# Altium PCB PCB_MCS_MEA_largeREF.PcbDoc
Units mm, origin at the board's own origin, x right, y up, seen from the top; angles counter-clockwise.
Board outline 49 x 49 mm, 4 copper layers (Top Copper Layer, Internal Copper Layer 1, Internal Copper Layer 2, Bottom Copper Layer), stack 1.58 mm thick; 1 components, 60 nets, 120 pads, 0 vias.
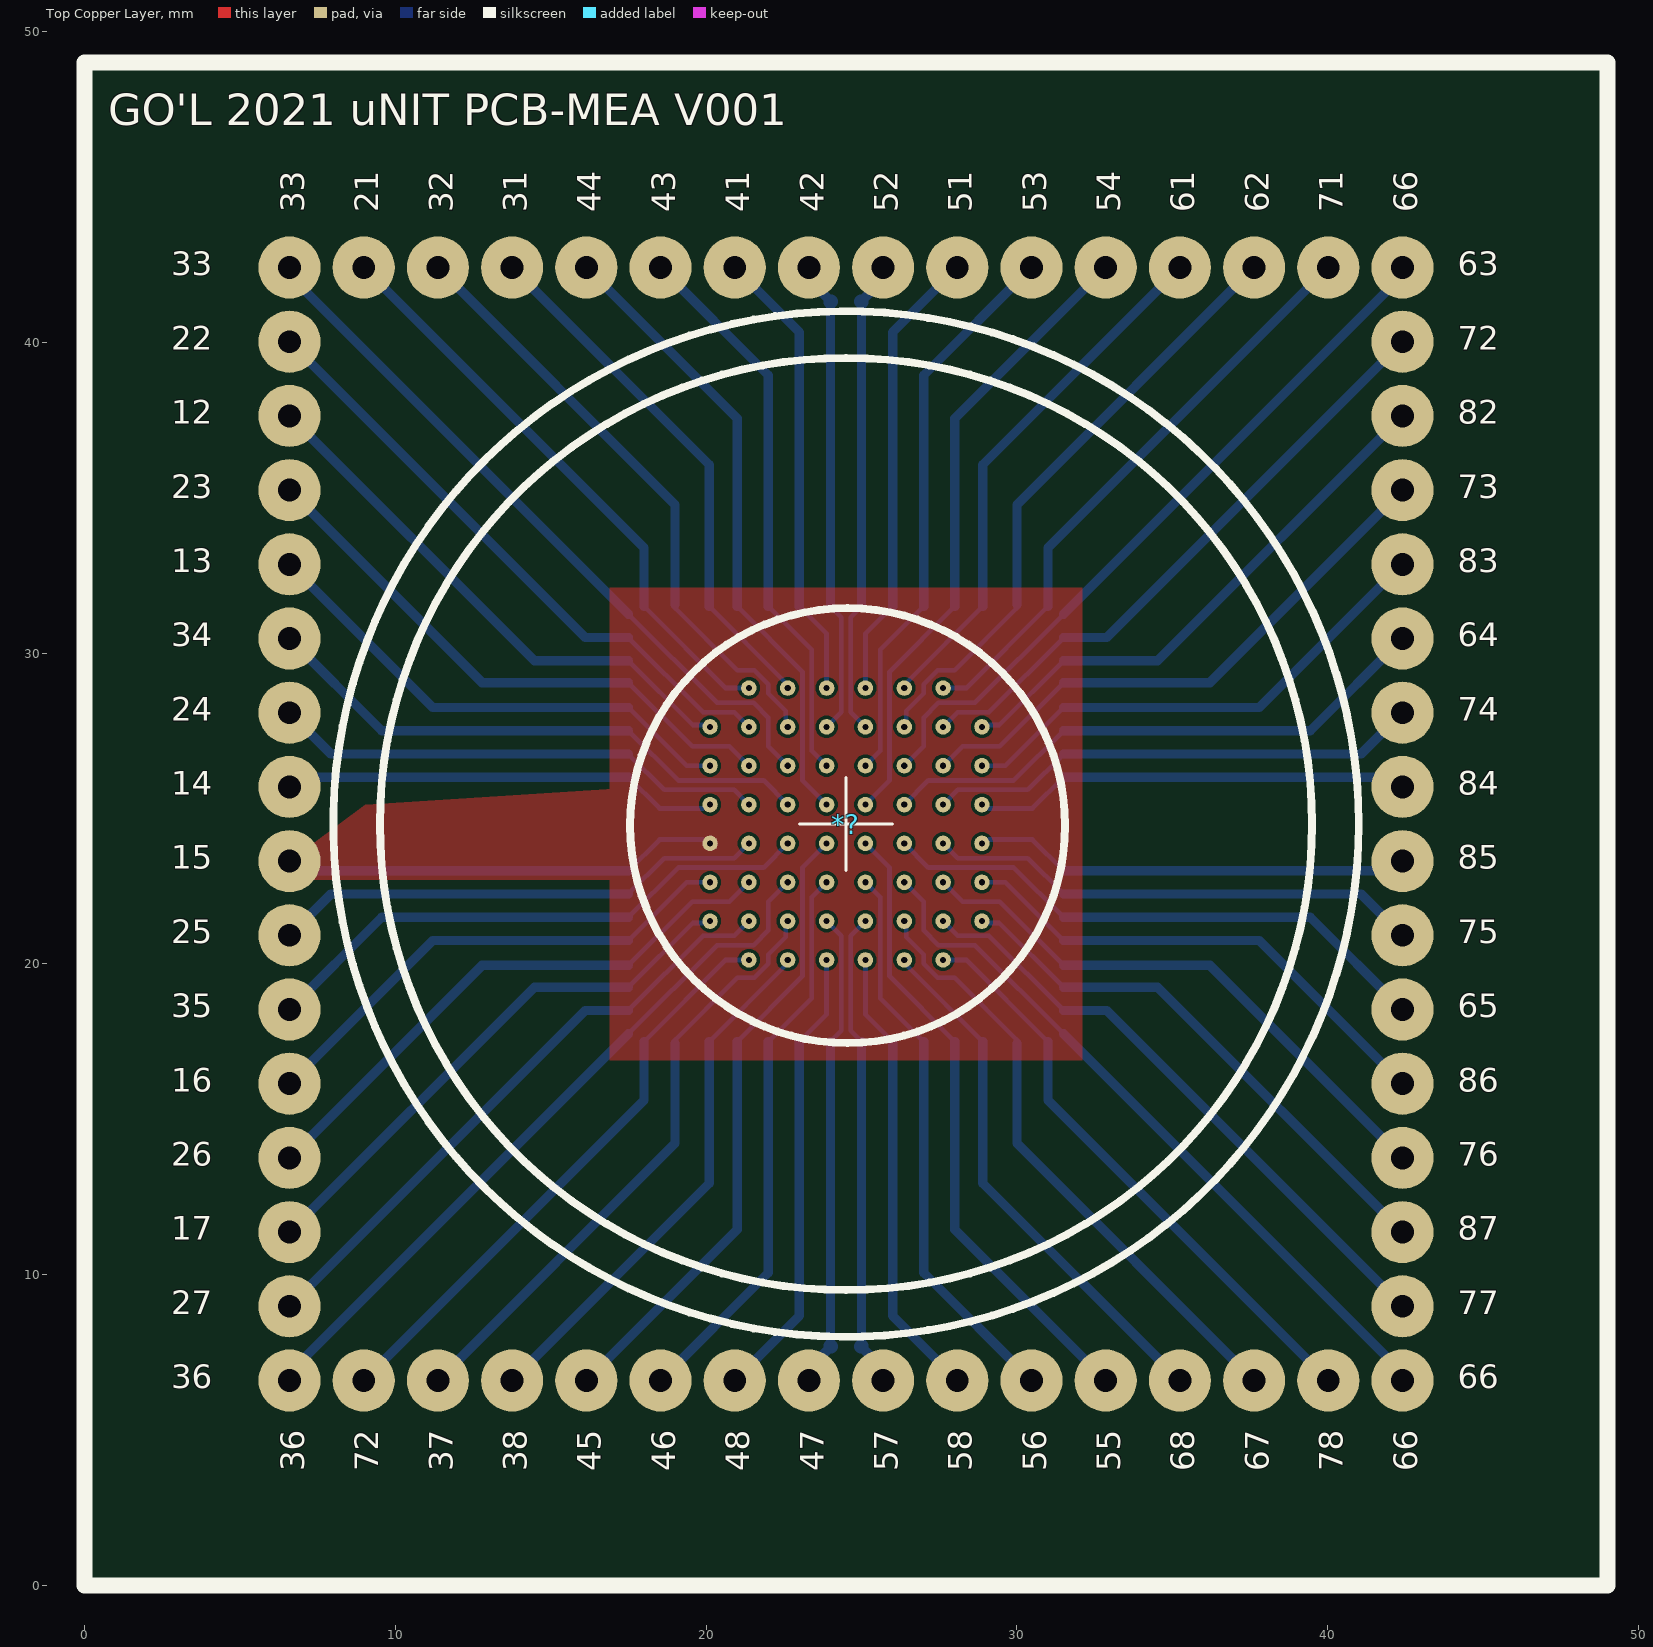
[diagram p0: Top Copper Layer view]
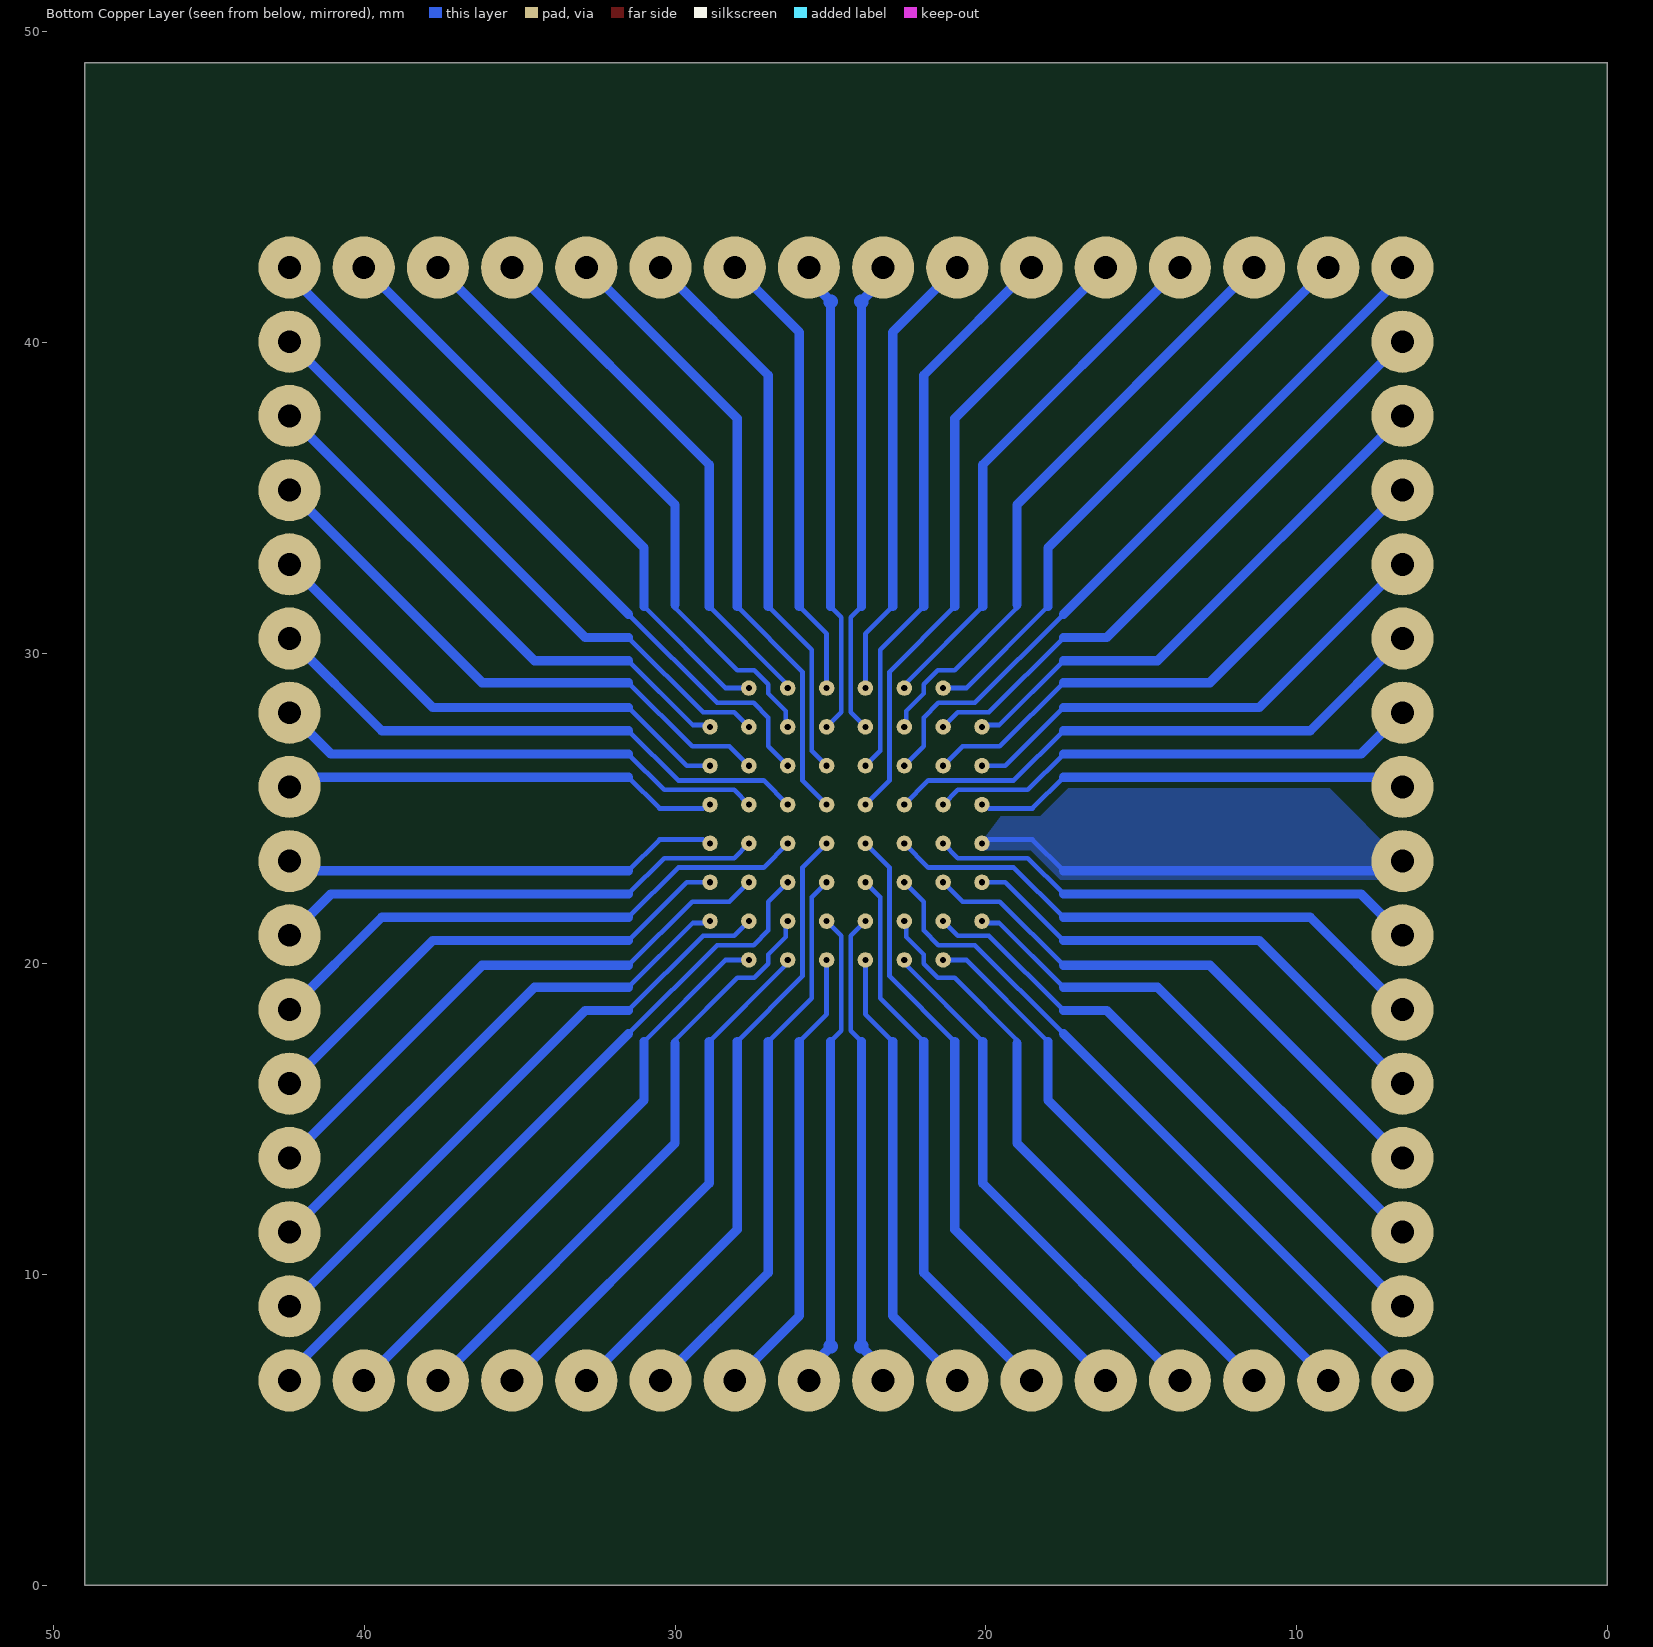
[diagram p1: Bottom Copper Layer view, seen from below]

## Layer stack, top to bottom
Top Solder: solder mask 0.01, Solder Resist, Dk 3.5
Top Copper Layer: signal copper 0.035
Dielectric 1: prepreg 0.22, FR-4, Dk 4.2
Internal Copper Layer 1: signal copper 0.035
Dielectric 2: core 1, FR-4, Dk 4.2
Internal Copper Layer 2: signal copper 0.035
Dielectric 3: prepreg 0.22, FR-4, Dk 4.2
Bottom Copper Layer: signal copper 0.035
Bottom Solder: solder mask 0.01, Solder Resist, Dk 3.5

## Board outline
0,0 49,0 49,49 0,49

## Design rules (kind name [scope] priority, off if disabled: settings)
BoardOutlineClearance [All] p1: gap=0.4 ignorepadtopadclearanceinfootprint=FALSE
Clearance [All] p1: gap=0.102 ignorepadtopadclearanceinfootprint=TRUE
ComponentClearance [All] p1: gap=0.15 collisioncheckmode=3 verticalgap=0.15 showdistances=FALSE
HoleSize [All] p1: absolutevalues=TRUE maxlimit=0.4 minlimit=0.25 maxpercent=80.000 minpercent=20.000
HoleToHoleClearance [All] p1: gap=0.45 allowstackedmicrovias=TRUE
MinimumAnnularRing [All] p1: minimumring=0.15
MinimumSolderMaskSliver [All] p1: minsoldermaskwidth=0.15
PlaneClearance [All] p1: clearance=0.15
PlaneConnect [All] p1: planeconnectstyle=Relief reliefexpansion=0.25 reliefentries=4 reliefconductorwidth=0.15 reliefairgap=0.15
PolygonConnect [All] p1: connectstyle=Direct reliefconductorwidth=0.15 reliefentries=4 polygonreliefangle="90 Angle" airgapwidth=0.15
RoomDefinition PCB_MCS_MEA_REF [InComponentClass('PCB_MCS_MEA_REF')] p1 off: confinementstyle=ConfineIn formatcopy=TRUE lockcomponents=FALSE outline 0,0 50.8,0 50.8,25.4 0,25.4
RoutingVias [All] p1: holewidth=0.25 width=0.55 viastyle="Through Hole" minholewidth=0.25 minwidth=0.55 maxholewidth=0.4 maxwidth=0.8
SilkToSilkClearance [All] p1: silktosilkclearance=0.2
SilkToSolderMaskClearance [IsPad] p1: minsilkscreentomaskgap=0.2 clearancetoexposedcopper=TRUE
SolderMaskExpansion [All] p1: expansion=0.15 istentingtop=FALSE
Width [All] p1: maxlimit=50 minlimit=0.15 preferedwidth=0.203
22 further rules are at their usual default settings.

## Components (designator, comment, footprint, x,y, rotation, side; value= is the part's Value field where it differs from the comment)
*? "POGO_PINS" MCS_MEA_VE_TEST_1P25 24.5,24.5 r0 top locked

## Footprints (in the part's own frame and the unit in brackets; to place one, negate y for a bottom-side part, rotate by r counter-clockwise, add the part's x,y. Pads: shape width x height; smd on the part's side, far side on the other; paste and mask are expansions set on the pad)
MCS_MEA_VE_TEST_1P25 [mm]
  round 2 hole 0.737 mask+0.15: 12(-17.907,13.132) 13(-17.907,8.357) 14(-17.907,1.194) 15(-17.907,-1.194) 16(-17.907,-8.357) 17(-17.907,-13.132) 21(-15.519,17.907) 22(-17.907,15.519) 23(-17.907,10.744) 24(-17.907,3.581) 25(-17.907,-3.581) 26(-17.907,-10.744) 27(-17.907,-15.519) 28(-15.519,-17.907) 31(-10.744,17.907) 32(-13.132,17.907) 33(-17.907,17.907) 34(-17.907,5.969) 35(-17.907,-5.969) 36(-17.907,-17.907) 37(-13.132,-17.907) 38(-10.744,-17.907) 41(-3.581,17.907) 42(-1.194,17.907) 43(-5.969,17.907) 44(-8.357,17.907) 45(-8.357,-17.907) 46(-5.969,-17.907) 47(-1.194,-17.907) 48(-3.581,-17.907) 51(3.581,17.907) 52(1.194,17.907) 53(5.969,17.907) 54(8.357,17.907) 55(8.357,-17.907) 56(5.969,-17.907) 57(1.194,-17.907) 58(3.581,-17.907) 61(10.744,17.907) 62(13.132,17.907) 63(17.907,17.907) 64(17.907,5.969) 65(17.907,-5.969) 66(17.907,-17.907) 67(13.132,-17.907) 68(10.744,-17.907) 71(15.519,17.907) 72(17.907,15.519) 73(17.907,10.744) 74(17.907,3.581) 75(17.907,-3.581) 76(17.907,-10.744) 77(17.907,-15.519) 78(15.519,-17.907) 82(17.907,13.132) 83(17.907,8.357) 84(17.907,1.194) 85(17.907,-1.194) 86(17.907,-8.357) 87(17.907,-13.132)
  round 0.5 hole 0.2 mask+0: 12(-4.375,3.125) 13(-4.375,1.875) 14(-4.375,0.625) 15(-4.375,-0.625) 16(-4.375,-1.875) 17(-4.375,-3.125) 21(-3.125,4.375) 22(-3.125,3.125) 23(-3.125,1.875) 24(-3.125,0.625) 25(-3.125,-0.625) 26(-3.125,-1.875) 27(-3.125,-3.125) 28(-3.125,-4.375) 31(-1.875,4.375) 32(-1.875,3.125) 33(-1.875,1.875) 34(-1.875,0.625) 35(-1.875,-0.625) 36(-1.875,-1.875) 37(-1.875,-3.125) 38(-1.875,-4.375) 41(-0.625,4.375) 42(-0.625,3.125) 43(-0.625,1.875) 44(-0.625,0.625) 45(-0.625,-0.625) 46(-0.625,-1.875) 47(-0.625,-3.125) 48(-0.625,-4.375) 51(0.625,4.375) 52(0.625,3.125) 53(0.625,1.875) 54(0.625,0.625) 55(0.625,-0.625) 56(0.625,-1.875) 57(0.625,-3.125) 58(0.625,-4.375) 61(1.875,4.375) 62(1.875,3.125) 63(1.875,1.875) 64(1.875,0.625) 65(1.875,-0.625) 66(1.875,-1.875) 67(1.875,-3.125) 68(1.875,-4.375) 71(3.125,4.375) 72(3.125,3.125) 73(3.125,1.875) 74(3.125,0.625) 75(3.125,-0.625) 76(3.125,-1.875) 77(3.125,-3.125) 78(3.125,-4.375) 82(4.375,3.125) 83(4.375,1.875) 84(4.375,0.625) 85(4.375,-0.625) 86(4.375,-1.875) 87(4.375,-3.125)
  silkscreen extent -24.5,-24.5 24.5,24.5

## Nets (pads, with @x,y where several pads share a name; then routed paths per layer and width w, separated by ;. In a path a pad name is that pad's centre, name@x,y a point inside that pad or via, vN(x,y) a via of type N, cw(c..) or ccw(c..) an arc to the next point about the centre after c; other vN are vias at no path point)
E0: *?.72 | length 19.9
  Bottom Copper Layer w0.152: *?.72@27.625,27.625 28.1,28.1 29.1,28.1 31.5,30.5
  Bottom Copper Layer w0.3: 31.5,30.5 32.888,30.5 *?.72@42.407,40.019
E1: *?.82 | length 17.7
  Bottom Copper Layer w0.15: *?.82@28.875,27.625 28.936,27.686 29.436,27.686 31.5,29.75
  Bottom Copper Layer w0.3: 31.5,29.75 34.525,29.75 *?.82@42.407,37.632
E2: *?.73 | length 18.5
  Bottom Copper Layer w0.15: *?.73@27.625,26.375 28.25,27 29.45,27 31.5,29.05
  Bottom Copper Layer w0.3: 31.5,29.05 36.213,29.05 *?.73@42.407,35.244
E3: *?.83 | length 16.2
  Bottom Copper Layer w0.15: *?.83@28.875,26.375 29.625,26.375 31.5,28.25
  Bottom Copper Layer w0.3: 31.5,28.25 37.8,28.25 *?.83@42.407,32.857
E4: *?.64 | length 18.2
  Bottom Copper Layer w0.152: *?.64@26.375,25.125 27.15,25.9 29.9,25.9 31.5,27.5
  Bottom Copper Layer w0.3: 31.5,27.5 39.438,27.5 *?.64@42.407,30.469
E5: *?.74 | length 16
  Bottom Copper Layer w0.152: *?.74@27.625,25.125 28.1,25.6 30.35,25.6 31.5,26.75
  Bottom Copper Layer w0.3: 31.5,26.75 41.076,26.75 *?.74@42.407,28.081
E6: *?.84 | length 14.1
  Bottom Copper Layer w0.15: *?.84@28.875,25.125 28.97,25.125 29.095,25 30.5,25 31.5,26
  Bottom Copper Layer w0.3: 31.5,26 42.101,26 *?.84@42.407,25.694
E7: *?.85 | length 14.1
  Bottom Copper Layer w0.15: *?.85@28.875,23.875 28.97,23.875 29.095,24 30.5,24 31.5,23
  Bottom Copper Layer w0.3: 31.5,23 42.101,23 *?.85@42.407,23.306
E8: *?.75 | length 16
  Bottom Copper Layer w0.152: *?.75@27.625,23.875 28.1,23.4 30.35,23.4 31.5,22.25
  Bottom Copper Layer w0.3: 31.5,22.25 41.076,22.25 *?.75@42.407,20.919
E9: *?.65 | length 18.2
  Bottom Copper Layer w0.152: *?.65@26.375,23.875 27.15,23.1 29.9,23.1 31.5,21.5
  Bottom Copper Layer w0.3: 31.5,21.5 39.438,21.5 *?.65@42.407,18.531
E10: *?.86 | length 16.2
  Bottom Copper Layer w0.15: *?.86@28.875,22.625 29.625,22.625 31.5,20.75
  Bottom Copper Layer w0.3: 31.5,20.75 37.8,20.75 *?.86@42.407,16.143
E11: *?.76 | length 18.5
  Bottom Copper Layer w0.15: *?.76@27.625,22.625 28.25,22 29.45,22 31.5,19.95
  Bottom Copper Layer w0.3: 31.5,19.95 36.213,19.95 *?.76@42.407,13.756
E12: *?.87 | length 17.7
  Bottom Copper Layer w0.15: *?.87@28.875,21.375 28.936,21.314 29.436,21.314 31.5,19.25
  Bottom Copper Layer w0.3: 31.5,19.25 34.525,19.25 *?.87@42.407,11.368
E13: *?.77 | length 19.9
  Bottom Copper Layer w0.152: *?.77@27.625,21.375 28.1,20.9 29.1,20.9 31.5,18.5
  Bottom Copper Layer w0.3: 31.5,18.5 32.888,18.5 *?.77@42.407,8.981
E14: *?.66 | length 23.4
  Bottom Copper Layer w0.152: *?.66@26.375,22.625 27,22 27,21.075 27.475,20.6 28.65,20.6 31.5,17.75
  Bottom Copper Layer w0.3: 31.5,17.75 42.407,6.843 *?.66@42.407,6.593
E15: *?.78 | length 19.1
  Bottom Copper Layer w0.15: *?.78@27.625,20.125 28.375,20.125 31,17.5
  Bottom Copper Layer w0.3: 31,17.5 31,15.612 *?.78@40.019,6.593
E16: *?.67 | length 19.8
  Bottom Copper Layer w0.15: *?.67@26.375,21.375 26.436,21.314 26.436,20.864 27,20.3 27,20 27.45,19.55 28,19.55 30,17.55 30,17.45
  Bottom Copper Layer w0.3: 30,17.45 30,14.225 *?.67@37.632,6.593
E17: *?.68 | length 17.2
  Bottom Copper Layer w0.15: *?.68@26.375,20.125 26.375,20.03 26.511,19.894 26.511,19.889 28.9,17.5
  Bottom Copper Layer w0.3: 28.9,17.5 28.9,12.937 *?.68@35.244,6.593
E18: *?.55 | length 20.5
  Bottom Copper Layer w0.152: *?.55@25.125,23.875 25.9,23.1 25.9,19.6 28,17.5
  Bottom Copper Layer w0.3: 28,17.5 28,11.45 *?.55@32.857,6.593
E19: *?.56 | length 18.2
  Bottom Copper Layer w0.152: *?.56@25.125,22.625 25.6,22.15 25.6,18.9 27,17.5
  Bottom Copper Layer w0.3: 27,17.5 27,10.062 *?.56@30.469,6.593
E20: *?.58 | length 14.8
  Bottom Copper Layer w0.15: *?.58@25.125,20.125 25.125,18.375 26,17.5
  Bottom Copper Layer w0.3: 26,17.5 26,8.674 *?.58@28.081,6.593
E21: *?.57 | length 15.4
  Bottom Copper Layer w0.152: 25,17.5 24.65,17.85 24.65,20.9 *?.57@25.125,21.375
  Bottom Copper Layer w0.3: 24.986,7.686 *?.57@25.694,6.979 ; 25,7.7 25,17.5
  Bottom Copper Layer w0.45: 24.986,7.686 25,7.7 ; *?.57@25.694,6.593 *?.57@25.694,6.979
E22: *?.47 | length 15.4
  Bottom Copper Layer w0.152: *?.47@23.875,21.375 24.35,20.9 24.35,17.85 24,17.5
  Bottom Copper Layer w0.3: *?.47@23.306,6.979 24.014,7.686 ; 24,7.7 24,17.5
  Bottom Copper Layer w0.45: *?.47@23.306,6.593 *?.47@23.306,6.979 ; 24,7.7 24.014,7.686
E23: *?.48 | length 14.8
  Bottom Copper Layer w0.15: 23,17.5 23.875,18.375 *?.48@23.875,20.125
  Bottom Copper Layer w0.3: *?.48@20.919,6.593 23,8.674 23,17.5
E24: *?.46 | length 18.2
  Bottom Copper Layer w0.152: 22,17.5 23.4,18.9 23.4,22.15 *?.46@23.875,22.625
  Bottom Copper Layer w0.3: *?.46@18.531,6.593 22,10.062 22,17.5
E25: *?.45 | length 20.5
  Bottom Copper Layer w0.152: 21,17.5 23.1,19.6 23.1,23.1 *?.45@23.875,23.875
  Bottom Copper Layer w0.3: *?.45@16.143,6.593 21,11.45 21,17.5
E26: *?.38 | length 17.2
  Bottom Copper Layer w0.15: 20.1,17.5 22.489,19.889 22.489,19.894 22.625,20.03 *?.38@22.625,20.125
  Bottom Copper Layer w0.3: *?.38@13.756,6.593 20.1,12.937 20.1,17.5
E27: *?.37 | length 19.8
  Bottom Copper Layer w0.15: 19,17.45 19,17.55 21,19.55 21.55,19.55 22,20 22,20.3 22.564,20.864 22.564,21.314 *?.37@22.625,21.375
  Bottom Copper Layer w0.3: *?.37@11.368,6.593 19,14.225 19,17.45
E28: *?.28 | length 19.1
  Bottom Copper Layer w0.15: 18,17.5 20.625,20.125 *?.28@21.375,20.125
  Bottom Copper Layer w0.3: *?.28@8.981,6.593 18,15.612 18,17.5
E29: *?.36 | length 23.4
  Bottom Copper Layer w0.152: 17.5,17.75 20.35,20.6 21.525,20.6 22,21.075 22,22 *?.36@22.625,22.625
  Bottom Copper Layer w0.3: *?.36@6.593,6.593 6.593,6.843 17.5,17.75
E31: *?.27 | length 19.9
  Bottom Copper Layer w0.152: 17.5,18.5 19.9,20.9 20.9,20.9 *?.27@21.375,21.375
  Bottom Copper Layer w0.3: *?.27@6.593,8.981 16.112,18.5 17.5,18.5
E32: *?.17 | length 17.7
  Bottom Copper Layer w0.15: 17.5,19.25 19.564,21.314 20.064,21.314 *?.17@20.125,21.375
  Bottom Copper Layer w0.3: *?.17@6.593,11.368 14.475,19.25 17.5,19.25
E33: *?.26 | length 18.5
  Bottom Copper Layer w0.15: 17.5,19.95 19.55,22 20.75,22 *?.26@21.375,22.625
  Bottom Copper Layer w0.3: *?.26@6.593,13.756 12.787,19.95 17.5,19.95
E34: *?.16 | length 16.2
  Bottom Copper Layer w0.15: 17.5,20.75 19.375,22.625 *?.16@20.125,22.625
  Bottom Copper Layer w0.3: *?.16@6.593,16.143 11.2,20.75 17.5,20.75
E35: *?.35 | length 18.2
  Bottom Copper Layer w0.152: 17.5,21.5 19.1,23.1 21.85,23.1 *?.35@22.625,23.875
  Bottom Copper Layer w0.3: *?.35@6.593,18.531 9.562,21.5 17.5,21.5
E36: *?.25 | length 16
  Bottom Copper Layer w0.152: 17.5,22.25 18.65,23.4 20.9,23.4 *?.25@21.375,23.875
  Bottom Copper Layer w0.3: *?.25@6.593,20.919 7.924,22.25 17.5,22.25
E37: *?.15 | length 14.1
  Bottom Copper Layer w0.15: 17.5,23 18.5,24 19.905,24 20.03,23.875 *?.15@20.125,23.875
  Bottom Copper Layer w0.3: *?.15@6.593,23.306 6.899,23 17.5,23
E38: *?.14 | length 14.1
  Bottom Copper Layer w0.15: 17.5,26 18.5,25 19.905,25 20.03,25.125 *?.14@20.125,25.125
  Bottom Copper Layer w0.3: *?.14@6.593,25.694 6.899,26 17.5,26
E39: *?.24 | length 16
  Bottom Copper Layer w0.152: 17.5,26.75 18.65,25.6 20.9,25.6 *?.24@21.375,25.125
  Bottom Copper Layer w0.3: *?.24@6.593,28.081 7.924,26.75 17.5,26.75
E40: *?.34 | length 18.2
  Bottom Copper Layer w0.152: 17.5,27.5 19.1,25.9 21.85,25.9 *?.34@22.625,25.125
  Bottom Copper Layer w0.3: *?.34@6.593,30.469 9.562,27.5 17.5,27.5
E41: *?.13 | length 16.2
  Bottom Copper Layer w0.15: 17.5,28.25 19.375,26.375 *?.13@20.125,26.375
  Bottom Copper Layer w0.3: *?.13@6.593,32.857 11.2,28.25 17.5,28.25
E42: *?.23 | length 18.5
  Bottom Copper Layer w0.15: 17.5,29.05 19.55,27 20.75,27 *?.23@21.375,26.375
  Bottom Copper Layer w0.3: *?.23@6.593,35.244 12.787,29.05 17.5,29.05
E43: *?.12 | length 17.7
  Bottom Copper Layer w0.15: 17.5,29.75 19.564,27.686 20.064,27.686 *?.12@20.125,27.625
  Bottom Copper Layer w0.3: *?.12@6.593,37.632 14.475,29.75 17.5,29.75
E44: *?.22 | length 19.9
  Bottom Copper Layer w0.152: 17.5,30.5 19.9,28.1 20.9,28.1 *?.22@21.375,27.625
  Bottom Copper Layer w0.3: *?.22@6.593,40.019 16.112,30.5 17.5,30.5
E45: *?.33 | length 23.4
  Bottom Copper Layer w0.152: 17.5,31.25 20.35,28.4 21.525,28.4 22,27.925 22,27 *?.33@22.625,26.375
  Bottom Copper Layer w0.3: *?.33@6.593,42.407 6.593,42.157 17.5,31.25
E46: *?.21 | length 19.1
  Bottom Copper Layer w0.15: 18,31.5 20.625,28.875 *?.21@21.375,28.875
  Bottom Copper Layer w0.3: *?.21@8.981,42.407 18,33.388 18,31.5
E47: *?.32 | length 19.8
  Bottom Copper Layer w0.15: 19,31.55 19,31.45 21,29.45 21.55,29.45 22,29 22,28.7 22.564,28.136 22.564,27.686 *?.32@22.625,27.625
  Bottom Copper Layer w0.3: *?.32@11.368,42.407 19,34.775 19,31.55
E48: *?.31 | length 17.2
  Bottom Copper Layer w0.15: 20.1,31.5 22.489,29.111 22.489,29.106 22.625,28.97 *?.31@22.625,28.875
  Bottom Copper Layer w0.3: *?.31@13.756,42.407 20.1,36.063 20.1,31.5
E49: *?.44 | length 20.5
  Bottom Copper Layer w0.152: 21,31.5 23.1,29.4 23.1,25.9 *?.44@23.875,25.125
  Bottom Copper Layer w0.3: *?.44@16.143,42.407 21,37.55 21,31.5
E50: *?.43 | length 18.2
  Bottom Copper Layer w0.152: 22,31.5 23.4,30.1 23.4,26.85 *?.43@23.875,26.375
  Bottom Copper Layer w0.3: *?.43@18.531,42.407 22,38.938 22,31.5
E51: *?.41 | length 14.8
  Bottom Copper Layer w0.15: 23,31.5 23.875,30.625 *?.41@23.875,28.875
  Bottom Copper Layer w0.3: *?.41@20.919,42.407 23,40.326 23,31.5
E52: *?.42 | length 15.4
  Bottom Copper Layer w0.152: *?.42@23.875,27.625 24.35,28.1 24.35,31.15 24,31.5
  Bottom Copper Layer w0.3: *?.42@23.306,42.021 24.014,41.314 ; 24,31.5 24,41.3
  Bottom Copper Layer w0.45: *?.42@23.306,42.021 *?.42@23.306,42.407 ; 24,41.3 24.014,41.314
E53: *?.52 | length 15.4
  Bottom Copper Layer w0.152: 25,31.5 24.65,31.15 24.65,28.1 *?.52@25.125,27.625
  Bottom Copper Layer w0.3: 24.986,41.314 *?.52@25.694,42.021 ; 25,31.5 25,41.3
  Bottom Copper Layer w0.45: 24.986,41.314 25,41.3 ; *?.52@25.694,42.021 *?.52@25.694,42.407
E54: *?.51 | length 14.8
  Bottom Copper Layer w0.15: *?.51@25.125,28.875 25.125,30.625 26,31.5
  Bottom Copper Layer w0.3: 26,31.5 26,40.326 *?.51@28.081,42.407
E55: *?.53 | length 18.2
  Bottom Copper Layer w0.152: *?.53@25.125,26.375 25.6,26.85 25.6,30.1 27,31.5
  Bottom Copper Layer w0.3: 27,31.5 27,38.938 *?.53@30.469,42.407
E56: *?.54 | length 20.5
  Bottom Copper Layer w0.152: *?.54@25.125,25.125 25.9,25.9 25.9,29.4 28,31.5
  Bottom Copper Layer w0.3: 28,31.5 28,37.55 *?.54@32.857,42.407
E57: *?.61 | length 17.2
  Bottom Copper Layer w0.15: *?.61@26.375,28.875 26.375,28.97 26.511,29.106 26.511,29.111 28.9,31.5
  Bottom Copper Layer w0.3: 28.9,31.5 28.9,36.063 *?.61@35.244,42.407
E58: *?.62 | length 19.8
  Bottom Copper Layer w0.15: *?.62@26.375,27.625 26.436,27.686 26.436,28.136 27,28.7 27,29 27.45,29.45 28,29.45 30,31.45 30,31.55
  Bottom Copper Layer w0.3: 30,31.55 30,34.775 *?.62@37.632,42.407
E59: *?.71 | length 19.1
  Bottom Copper Layer w0.15: *?.71@27.625,28.875 28.375,28.875 31,31.5
  Bottom Copper Layer w0.3: 31,31.5 31,33.388 *?.71@40.019,42.407
E60: *?.63 | length 23.4
  Bottom Copper Layer w0.152: *?.63@26.375,26.375 27,27 27,27.925 27.475,28.4 28.65,28.4 31.5,31.25
  Bottom Copper Layer w0.3: 31.5,31.25 42.407,42.157 *?.63@42.407,42.407

## Polygon pours and split planes (outlines as drawn)
E37 on Bottom Copper Layer "E37_L04_P000" (solid, pour order 0): 6.593,23.306 8.937,25.65 17.35,25.65 18.25,24.75 19.525,24.75 20.2,23.85 20.2,23.65 18.55,23.65 17.6,22.7 7.199,22.7
E37 on Top Copper Layer "E37_L01_P002" (solid, pour order 2): 6.421,23.179 9.034,25.12 18.055,25.695 19,24.75 19.525,24.75 20.2,23.85 20.1,23.65 18.55,23.65 17.6,22.7 6.9,22.7
E37 on Top Copper Layer "E37_L01_P004" (solid, pour order 4): 16.9,16.9 32.1,16.9 32.1,32.1 16.9,32.1

## Silkscreen, mask and mechanical layers (free items; w line width, h text height)
Top Overlay:
  circle w0.254: c24.55,24.45 r7
  circle w0.254: c24.5,24.5 r15
  circle w0.254: c24.5,24.5 r16.5
  lines w0.1: 23,24.5 26,24.5 ; 24.5,23 24.5,26
  lines w0.508: 0,0 0,49 ; 0,0 49,0 ; 0,0 49,0 ; 0,0 0,49 ; 0,49 49,49 ; 0,49 49,49 ; 49,0 49,49 ; 49,0 49,49
  text "GO'L 2021 uNIT PCB-MEA V001" at 0.762,46.99 h1.02
Top Solder:
  circle w14: c24.55,24.45 r0

## Text inside footprints (layer, text, board x,y; h text height)
*?: Top Overlay "66" at 42.877,44.181 h0.76 r90; Top Overlay "71" at 40.489,44.181 h0.76 r90; Top Overlay "62" at 38.102,44.181 h0.76 r90; Top Overlay "61" at 35.714,44.181 h0.76 r90; Top Overlay "54" at 33.326,44.181 h0.76 r90; Top Overlay "53" at 30.939,44.181 h0.76 r90; Top Overlay "51" at 28.551,44.181 h0.76 r90; Top Overlay "52" at 26.164,44.181 h0.76 r90; Top Overlay "42" at 23.776,44.181 h0.76 r90; Top Overlay "41" at 21.388,44.181 h0.76 r90; Top Overlay "43" at 19.001,44.181 h0.76 r90; Top Overlay "44" at 16.613,44.181 h0.76 r90; Top Overlay "31" at 14.226,44.181 h0.76 r90; Top Overlay "32" at 11.838,44.181 h0.76 r90; Top Overlay "21" at 9.45,44.181 h0.76 r90; Top Overlay "33" at 7.063,44.181 h0.76 r90; Top Overlay "66" at 42.877,3.668 h0.76 r90; Top Overlay "78" at 40.489,3.668 h0.76 r90; Top Overlay "67" at 38.102,3.668 h0.76 r90; Top Overlay "68" at 35.714,3.668 h0.76 r90; Top Overlay "55" at 33.326,3.668 h0.76 r90; Top Overlay "56" at 30.939,3.668 h0.76 r90; Top Overlay "58" at 28.551,3.668 h0.76 r90; Top Overlay "57" at 26.164,3.668 h0.76 r90; Top Overlay "47" at 23.776,3.668 h0.76 r90; Top Overlay "48" at 21.388,3.668 h0.76 r90; Top Overlay "46" at 19.001,3.668 h0.76 r90; Top Overlay "45" at 16.613,3.668 h0.76 r90; Top Overlay "38" at 14.226,3.668 h0.76 r90; Top Overlay "37" at 11.838,3.668 h0.76 r90; Top Overlay "72" at 9.45,3.668 h0.76 r90; Top Overlay "36" at 7.063,3.668 h0.76 r90; Top Overlay "66" at 44.185,6.339 h0.76; Top Overlay "77" at 44.185,8.727 h0.76; Top Overlay "87" at 44.185,11.114 h0.76; Top Overlay "76" at 44.185,13.502 h0.76; Top Overlay "86" at 44.185,15.889 h0.76; Top Overlay "65" at 44.185,18.277 h0.76; Top Overlay "75" at 44.185,20.665 h0.76; Top Overlay "85" at 44.185,23.052 h0.76; Top Overlay "84" at 44.185,25.44 h0.76; Top Overlay "74" at 44.185,27.827 h0.76; Top Overlay "64" at 44.185,30.215 h0.76; Top Overlay "83" at 44.185,32.603 h0.76; Top Overlay "73" at 44.185,34.99 h0.76; Top Overlay "82" at 44.185,37.378 h0.76; Top Overlay "72" at 44.185,39.765 h0.76; Top Overlay "63" at 44.185,42.153 h0.76; Top Overlay "36" at 2.783,6.339 h0.76; Top Overlay "27" at 2.783,8.727 h0.76; Top Overlay "17" at 2.783,11.114 h0.76; Top Overlay "26" at 2.783,13.502 h0.76; Top Overlay "16" at 2.783,15.889 h0.76; Top Overlay "35" at 2.783,18.277 h0.76; Top Overlay "25" at 2.783,20.665 h0.76; Top Overlay "15" at 2.783,23.052 h0.76; Top Overlay "14" at 2.783,25.44 h0.76; Top Overlay "24" at 2.783,27.827 h0.76; Top Overlay "34" at 2.783,30.215 h0.76; Top Overlay "13" at 2.783,32.603 h0.76; Top Overlay "23" at 2.783,34.99 h0.76; Top Overlay "12" at 2.783,37.378 h0.76; Top Overlay "22" at 2.783,39.765 h0.76; Top Overlay "33" at 2.783,42.153 h0.76